# Altium PCB RPi Stepper Hat V1.1 PcbDoc.PcbDoc
Units mm, origin at the board's own origin, x right, y up, seen from the top; angles counter-clockwise.
Board outline 122 x 60.5 mm, 2 copper layers (Top Layer, Bottom Layer), stack 0.671 mm thick; 30 components, 21 nets, 137 pads, 21 vias.
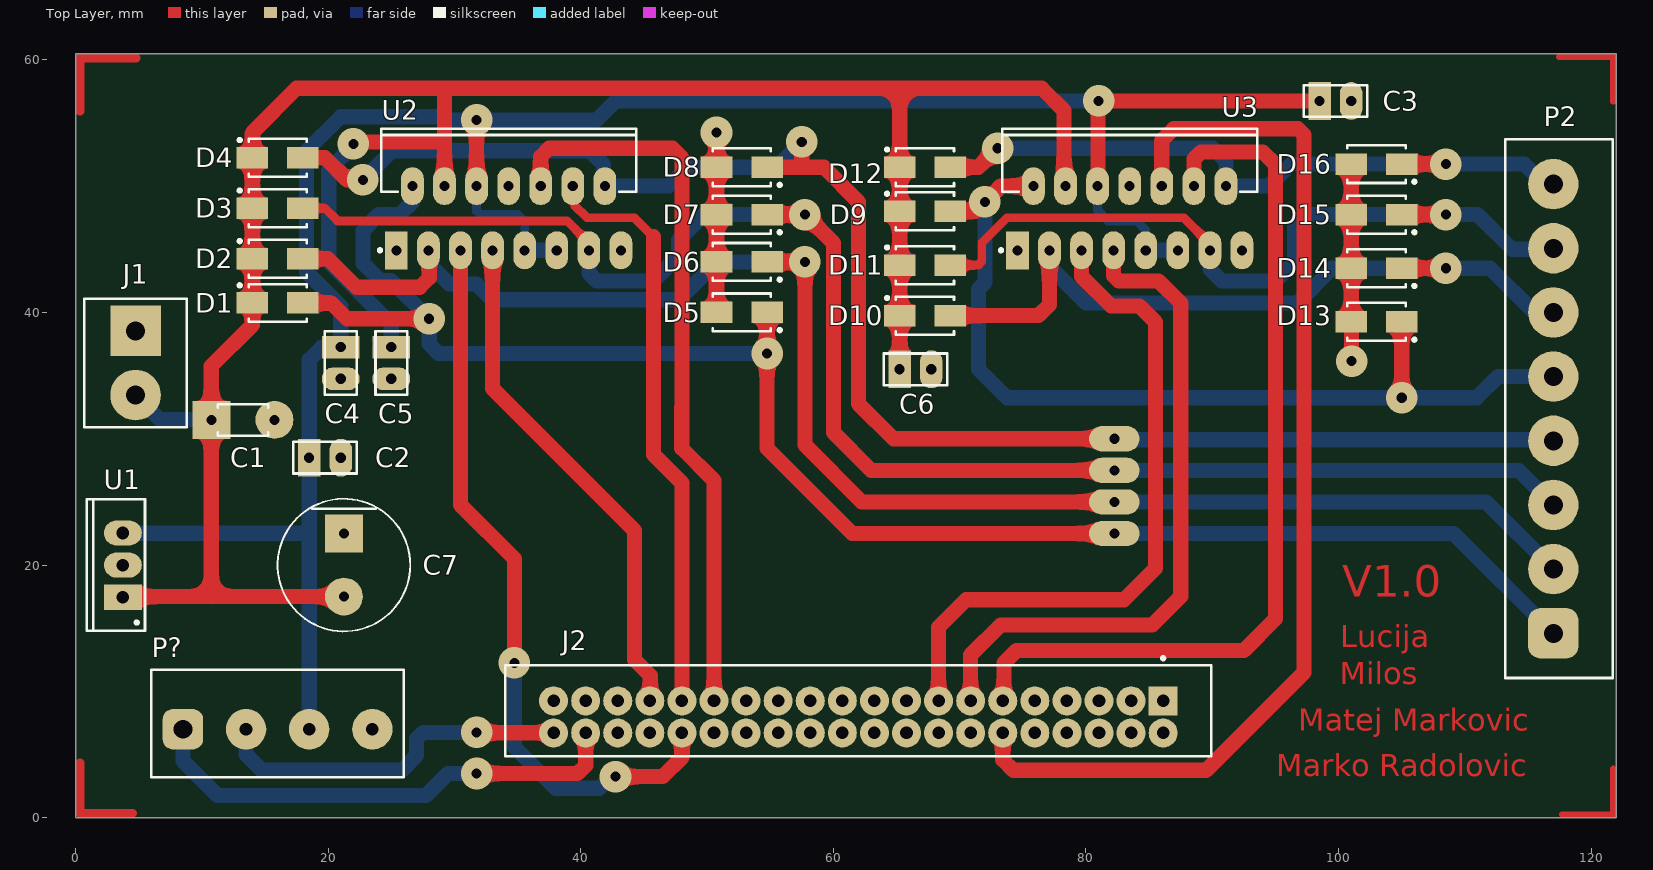
[diagram p0: Top Layer view]
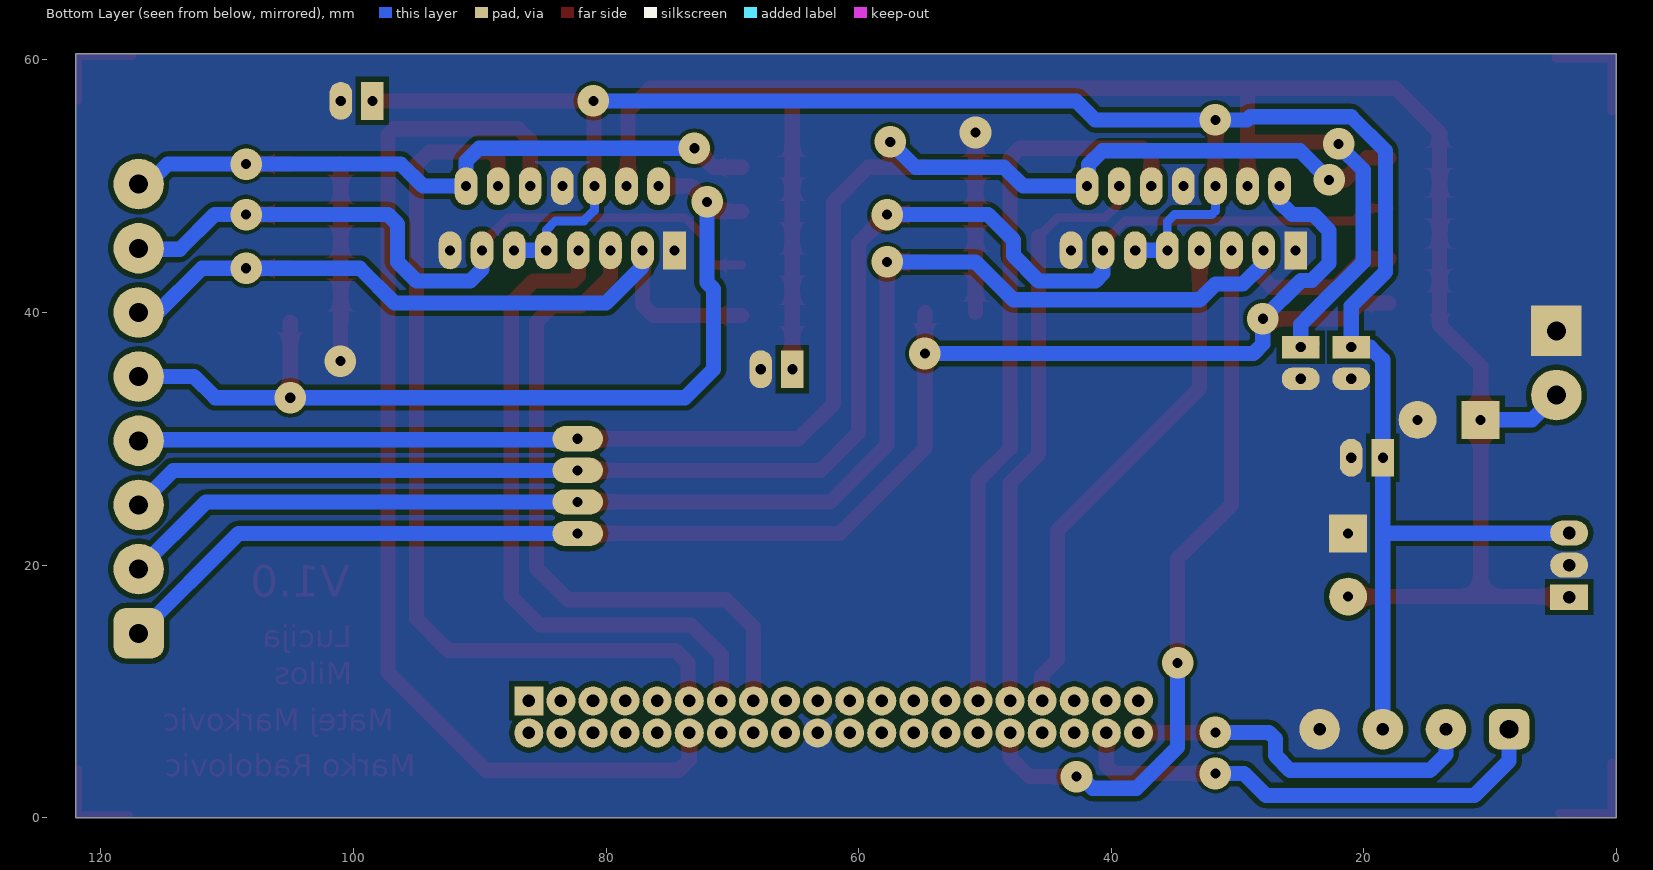
[diagram p1: Bottom Layer view, seen from below]
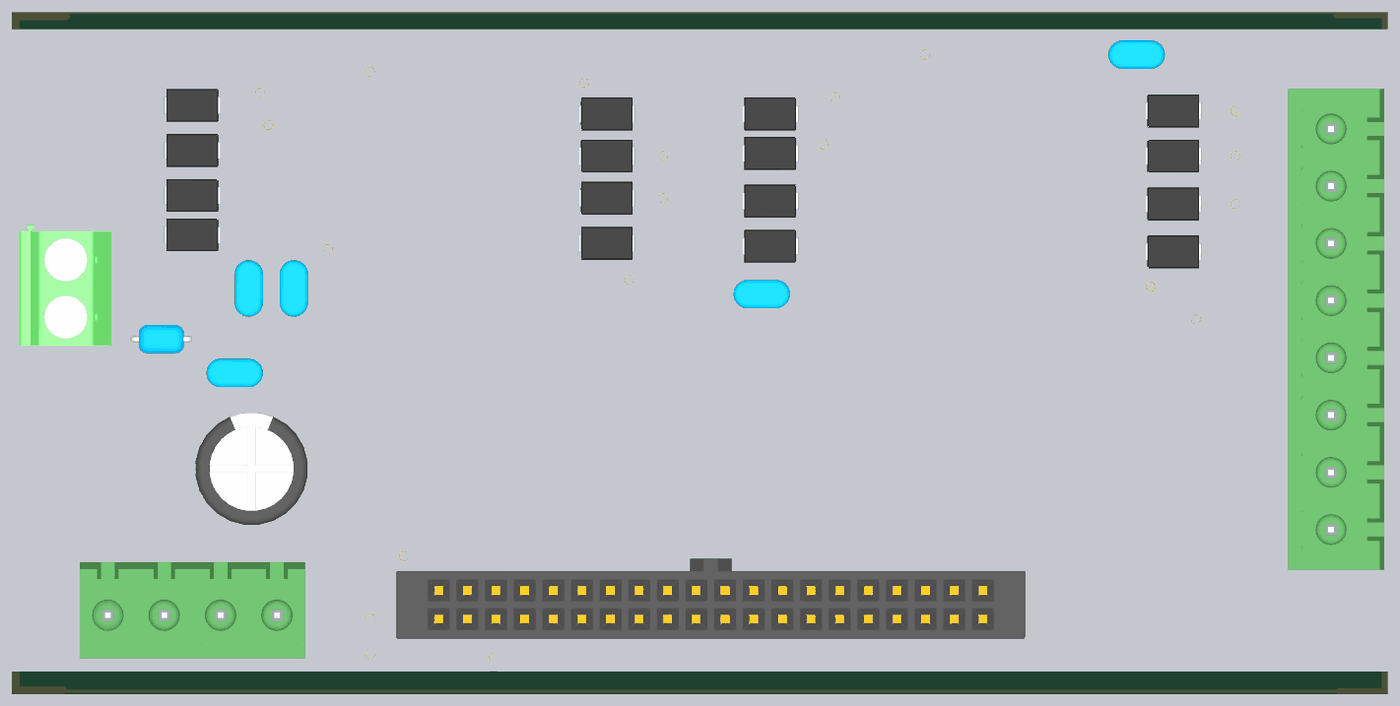
[diagram p2: 3D render of the assembled board from above, using the file's embedded part models]

## Layer stack, top to bottom
Top Solder: solder mask 0.0102, Solder Resist, Dk 3.5
Top Layer: signal copper 0.0356
Dielectric 1: dielectric 0.6, FR-4, Dk 4.8
Bottom Layer: signal copper 0.0356
Bottom Solder: solder mask 0.0102, Solder Resist, Dk 3.5

## Board outline
0,0 122,0 122,60.5 0,60.5

## Design rules (kind name [scope] priority, off if disabled: settings)
Clearance [All] p1: gap=0.3 ignorepadtopadclearanceinfootprint=TRUE except(0.4: Track-Poly THPad-Poly)
PolygonConnect [All] p1: connectstyle=Direct reliefconductorwidth=0.254 reliefentries=4 polygonreliefangle="90 Angle" airgapwidth=0.254
RoutingVias [All] p1: holewidth=0.711 width=1.27 viastyle="Through Hole" minholewidth=0.711 minwidth=1.27 maxholewidth=0.711 maxwidth=1.27
SolderMaskExpansion [All] p1: expansion=0.102 istentingtop=FALSE
Width [All] p1: maxlimit=2 minlimit=0.5 preferedwidth=0.5
30 further rules are at their usual default settings.

## Components (designator, comment, footprint, x,y, rotation, side; value= is the part's Value field where it differs from the comment)
C1 "220n" FP-RCE1K1-2_5-MFG 13.25,31.5 r0 top
C2 "100n" FP-RDE0P1-MFG 19.75,28.5 r0 top
C3 "100n" FP-RDE0P1-MFG 99.75,56.75 r0 top
C4 "100n" FP-RDE0P1-MFG 21,36 r270 top
C5 "100n" FP-RDE0P1-MFG 25,36 r270 top
C6 "100n" FP-RDE0P1-MFG 66.5,35.5 r0 top
C7 "220u" FP-RAD-TH-D_10_0_5-L_25_2-MFG 21.25,20 r270 top
D1 "RFN2VWM2STR" DIOM4326X24N 16,40.75 r0 top
D2 "RFN2VWM2STR" DIOM4326X24N 16,44.25 r0 top
D3 "RFN2VWM2STR" DIOM4326X24N 16,48.25 r0 top
D4 "RFN2VWM2STR" DIOM4326X24N 16,52.25 r0 top
D5 "RFN2VWM2STR" DIOM4326X24N 52.75,40 r180 top
D6 "RFN2VWM2STR" DIOM4326X24N 52.75,44 r180 top
D7 "RFN2VWM2STR" DIOM4326X24N 52.75,47.75 r180 top
D8 "RFN2VWM2STR" DIOM4326X24N 52.75,51.5 r180 top
D9 "RFN2VWM2STR" DIOM4326X24N 67.25,48 r0 top
D10 "RFN2VWM2STR" DIOM4326X24N 67.25,39.75 r0 top
D11 "RFN2VWM2STR" DIOM4326X24N 67.25,43.75 r0 top
D12 "RFN2VWM2STR" DIOM4326X24N 67.25,51.5 r0 top
D13 "RFN2VWM2STR" DIOM4326X24N 103,39.25 r180 top
D14 "RFN2VWM2STR" DIOM4326X24N 103,43.5 r180 top
D15 "RFN2VWM2STR" DIOM4326X24N 103,47.75 r180 top
D16 "RFN2VWM2STR" DIOM4326X24N 103,51.75 r180 top
J1 "1729128" PHOE-1729128-2_V 4.75,36 r270 top
J2 "SFH11-PBPC-D20-ST-BK" FP-SFH11-PBPC-D20-ST-BK-MFG 61.98,8.48 r180 top
P2 "691311500108" 691311500108 117.45,32.38 r90 top
P? "691311700004" 691311700004 16,7.45 r0 top
U1 "L7805CV" TO220 3.75,20 r90 top
U2 "L298N" STM-FM-15 34.29,47.46 r90 top
U3 "L298N" STM-FM-15 83.46,47.46 r90 top

## Footprints (in the part's own frame and the unit in brackets; to place one, negate y for a bottom-side part, rotate by r counter-clockwise, add the part's x,y. Pads: shape width x height; smd on the part's side, far side on the other; paste and mask are expansions set on the pad)
691311500108 [mm] "5,08mm - PCB Headers - Vertical - Closed ends -08p"
  rrect50% 4x4 hole 1.5: 1(-17.78,0.45)
  round 4 hole 1.5: 2(-12.7,0.45) 3(-7.62,0.45) 4(-2.54,0.45) 5(2.54,0.45) 6(7.62,0.45) 7(12.7,0.45) 8(17.78,0.45)
  silkscreen extent -21.32,-4.25 21.32,4.25, body extent -21.32,-4.25 21.32,4.25, height 12.05
691311700004 [mm] "5.00mm - Open Vertical PCB Header - 04p"
  rrect50% 3.2x3.2 hole 1.5: 1(-7.5,-0.45)
  round 3.2 hole 1: 2(-2.5,-0.45) 3(2.5,-0.45) 4(7.5,-0.45)
  silkscreen extent -10,-4.25 10,4.25, body extent -10,-4.25 10,4.25, height 12.1
DIOM4326X24N [mm] "Molded Diode, 2-Leads, Body 4.30x2.61mm, IPC Medium Density"
  rect 2.5x1.7 smd: A(2,0) K(-2,0)
  silkscreen extent -3.12,-1.5 2.3,1.52, body extent -2.52,-1.46 2.52,1.46, height 2.4
FP-RAD-TH-D_10_0_5-L_25_2-MFG [mm]
  rect 3x3 hole 0.8 paste-1000 mask+0: 1(-2.5,0)
  round 3 hole 0.8 paste-1000 mask+0: 2(2.5,0)
  silkscreen extent -5.25,-5.25 5.25,5.25, body extent -5.35,-5.35 5.35,5.35, height 0.25
FP-RCE1K1-2_5-MFG [mm]
  rect 3x3 hole 0.8 paste-1000 mask+0: 1(-2.5,0)
  round 3 hole 0.8 paste-1000 mask+0: 2(2.5,0)
  silkscreen extent -2,-1.25 2,1.25, body extent -3.2,-1.35 3.2,1.35, height 0.25
FP-RDE0P1-MFG [mm]
  rect 1.8x3 hole 0.8 paste-1000 mask+0: 1(-1.25,0)
  oval 1.8x3 hole 0.8 paste-1000 mask+0: 2(1.25,0)
  silkscreen extent -2.5,-1.25 2.5,1.25, body extent -2.6,-1.35 2.6,1.35, height 0.25
FP-SFH11-PBPC-D20-ST-BK-MFG [mm]
  rect 2.3x2.3 hole 1 paste-1000 mask+0: 1(-24.13,-0.77)
  round 2.3 hole 1 paste-1000 mask+0: 2(-24.13,1.77) 3(-21.59,-0.77) 4(-21.59,1.77) 5(-19.05,-0.77) 6(-19.05,1.77) 7(-16.51,-0.77) 8(-16.51,1.77) 9(-13.97,-0.77) 10(-13.97,1.77) 11(-11.43,-0.77) 12(-11.43,1.77) 13(-8.89,-0.77) 14(-8.89,1.77) 15(-6.35,-0.77) 16(-6.35,1.77) 17(-3.81,-0.77) 18(-3.81,1.77) 19(-1.27,-0.77) 20(-1.27,1.77) 21(1.27,-0.77) 22(1.27,1.77) 23(3.81,-0.77) 24(3.81,1.77) 25(6.35,-0.77) 26(6.35,1.77) 27(8.89,-0.77) 28(8.89,1.77) 29(11.43,-0.77) 30(11.43,1.77) 31(13.97,-0.77) 32(13.97,1.77) 33(16.51,-0.77) 34(16.51,1.77) 35(19.05,-0.77) 36(19.05,1.77) 37(21.59,-0.77) 38(21.59,1.77) 39(24.13,-0.77) 40(24.13,1.77)
  silkscreen extent -27.94,-4.27 27.94,3.6, body extent -27.86,-3.55 27.86,3.55, height 8.7
PHOE-1729128-2_V [mm] "Receptacle, 2-Leads, Body 8.1x10.16mm, Pitch 5.08mm"
  rect 4x4 hole 1.5: 1(-2.54,0)
  round 4 hole 1.5: 2(2.54,0)
  silkscreen extent -5.08,-4.05 5.08,4.05, body extent -5.65,-4.05 5.08,4.05, height 10.01
STM-FM-15 [mm] "FM, 15-Leads, Body 20.2x5mm, Pitch 1.27mm"
  rect 3x1.8 hole 0.8: 1(-2.54,8.89)
  oval 3x1.8 hole 0.8: 2(2.54,7.62) 3(-2.54,6.35) 4(2.54,5.08) 5(-2.54,3.81) 6(2.54,2.54) 7(-2.54,1.27) 8(2.54,0) 9(-2.54,-1.27) 10(2.54,-2.54) 11(-2.54,-3.81) 12(2.54,-5.08) 13(-2.54,-6.35) 14(2.54,-7.62) 15(-2.54,-8.89)
  silkscreen extent -2.66,-10.1 7.09,10.31, body extent -2.8,-10.1 7.09,10.1, height 21
TO220 [mm] "TO, Thru-Hole, Vertical, Heatsink Mounted; 3 In-Line Leads; Pitch 2.54 mm"
  rect 2x3 hole 1: 1(-2.54,0)
  oval 2x3 hole 1: 2(0,0) 3(2.54,0)
  silkscreen extent -5.2,-1.75 5.2,2.85, body extent -5.25,-1.8 5.25,2.9, height 19.7

## Part data
C1: library part CMP-06035-036150-1, "Cap Ceramic Monolithic 220nF 50V 10% Thru-Hole Bulk RCER71H224K1M1H03A", Capacitance=220nF, Case/Package=Radial, Dielectric=X7R, Max Operating Temperature=125°C, Min Operating Temperature=-55°C, Package Quantity=1, Ratings=AEC-Q200, Resistor Type=Ceramic, Tolerance=10%, Voltage Rating=50V, Height=3.5mm, Height - Seated (Max)=0.138inch, Lead Diameter=0.5mm, Lead Pitch=0.197inch, Lead/Base Style="Formed Leads", Length=0.157inch, Mount="Through Hole", Packaging="Tape and Reel", Termination=Radial, Voltage Rating (DC)=50V, Width=0.098inch
C2 C3 C4 C5 C6: library part CMP-06035-046728-1, "Ceramic Capacitor 100nF ±10% 25V X7R Radial RDER71E104K0S1H03A", Capacitance=100nF, Case/Package=Radial, Dielectric=X7R, Max Operating Temperature=125°C, Min Operating Temperature=-55°C, Package Quantity=2000, Resistor Type=Ceramic, Tolerance=10%, Voltage Rating=25V, Height=3.5mm, Height - Seated (Max)=0.236inch, Lead Diameter=0.5mm, Lead Free="Lead Free", Lead Pitch=0.098inch, Length=0.197inch, Mount="Through Hole", Packaging="Tape and Reel", Termination=Radial, Voltage Rating (DC)=25V, Width=3.5mm
C7: library part CMP-05427-000604-1, "Aluminum Electrolytic Capacitors (Radial Lead Type) 220uF ±20% 63V EEUFR1J221LB", Capacitance=220uF, Case/Package=Radial, ESR (Equivalent Series Resistance)=33mR, Max Operating Temperature=105°C, Min Operating Temperature=-40°C, Package Quantity=500, Ripple Current=1.5A, Tolerance=20%, Voltage Rating=63V, Construction=Cylindrical, Diameter=10mm, Height=25mm, Height - Seated (Max)=1.063inch, Impedance=33mR, Lead Diameter=0.6mm, Lead Free="Lead Free", Lead Pitch=5mm, Length=25mm, Life (Hours)=10000Hour, Mount="Through Hole", Packaging="Tape and Reel", Polarity=Polar, Radiation Hardening=No, REACH SVHC=Yes, RoHS Compliant=Yes, Series=FR, Termination=Radial, Voltage Rating (DC)=63V
J1: library part CMP-2000-05815-1, "PCB Terminal Block, 13.5 A, 400 V, 2-Pin THD, RoHS, Bulk", Current Rating=13500mA, Manufacturer="Phoenix Contact", Package Description="2-Pin Through Hole Device, Body 8.1 x 10.16 mm, Pitch 5.08 mm", Package Reference=1729128-2, Package Version=03/2015, Voltage Rating=400V, Datasheet URL=https://datasheet.ciiva.com/16046/1729128-16046181.pdf, Datasheet Version=12/2013, Manufacturer URL=http://www.phoenixcontact.com/, Mounting Technology=ThroughHole, No. of Positions=2, No. of Rows=1, Orientation=Horizontal, Package URL=https://www.phoenixcontact.com/online/portal/pi/pxc/product_detail_page/!ut/p/b1/3VdJjqNKFDxLH8AFycySyWY2ozFsEPOMMQaDOX1XedGL_1Vdm5YXJleknhSKeBkvI6EA8ncAo3AYoDhBQGco6KN7VURTdemj9us_IEKEZo_YHiPAEWEFmDGOHMORkqKYCORBZxgL7ZoaZYcbFFUZ3fqxSY6GOuxydWUuHqz1ynmMFygu583Bob0Ewr6Sd_l-5m-kAueHiB0jpRwZwe58wwtkpxtMYd_LmGcDRU02dRNEyWt6Y2ti5pSyJ_reIkzIulrqApdnbT11V5jnCKbYNCvhEM1MCpPByat_X379-iThf08CI5GfOPqfBeS3BRoBOdD55AKVv0iLwCMq-2BrzXWSGRH7pUGD9uwXQjiph3xL0DKQwdGa0JImiIOmBNOestqgwTHSSs2oOep-78apyXQBvNi8ZLaFjvjWvcaUEBu0MC6Wbe-d6mB0FAebo2lUWinqYaZs5DAYzV0RP9yitUjnGJ0iI9xhZkT42OCQNUJJhkgWINNQLP2JFP6OpMg3JCVg70jqHT0lvKOnhHf0lPuOnnLf0VPuWx6_dxwUIvwk5WMkT0kLL1mh61l2yZVSzG3pYV_bqo-mj6uMKwKwdnnW8Jh5RTOJzMOA5c-eJDaZQw4mTMPH02PvS_ZAqNVjVTo2WyYLkwH_KU1mmmG5kjRhDqPXLwwVHvVOjCM60-fpXvTDfMGW1PVFVS1r4e4yVDk4ZdNbkUHvqPqQSeian4UD39fNKmachqdJ1NJbyk8rXT9mXTvPk3oE5meulKGgiruPJek-4I9hTT6G8ZLOyRSm2RRVbThERQad5OS28hdt4YW4vG0stgYYzsWsK4_7y6DZMjJSCqri1kyiZR5vD7pwIrNR7QwPHTcLTI5qT7eRlpHrdGiupYlqQDJ7zy_CND8fWWBoLRXxk1RVcXiBQwbTD4Xi7KL-FuO94t9xaqweXzH, Packing=Bulk, PartNumber=1729128, Pitch=5.08mm, RoHS=TRUE
J2: library part CMP-25680-000025-1, "CONN HDR 40POS 0.1 GOLD PCB", Color=Black, Package Quantity=1, Connector Type=Header, Contact Plating=Gold, Lead Free="Lead Free", Mount="Through Hole", Number of Positions=40, Number of Rows=2, Packaging=Tray, Pitch=0.1inch, Row Spacing=0.1inch, Termination=Solder
P2: library part CMP-1502-02152-2, Color=Green, Current=20A, Voltage=300V, Contact Gender=Male, Contact Material=Brass, Contact Plating=Tin, Current Rating=20A, Gender=Male, Height=12mm, Lead Pitch=5.08mm, Length=8.5mm, Mount="Through Hole", NexarPartId=8917752, Number of Contacts=8, Number of Levels=1, Number of Pins=8, Number of Positions Per Level=8, Number of Rows=1, Orientation=Vertical, Packaging=Box, Pitch=5.08mm, REACH SVHC="No SVHC", RoHS=Compliant, Termination=Solder, Width=42.64mm
P?: library part CMP-1502-02028-2, Color=Green, Current=20A, Voltage=300V, Connector Type="PCB, Terminal Block", Contact Material=Brass, Gender=Male, Height=12mm, Lead Pitch=5mm, Length=8.5mm, Mount="Through Hole", NexarPartId=18818306, Number of Contacts=4, Number of Levels=1, Number of Pins=4, Number of Positions Per Level=4, Number of Rows=1, Orientation=Vertical, Packaging=Box, Pitch=5.0038mm, REACH SVHC=Unknown, RoHS=Compliant, Termination=Solder, Width=20mm
U1: library part CMP-0244-00483-1, "Positive Voltage Regulator, 5V, 3-Pin TO-220", ComponentLink1Description="Manufacturer URL", ComponentLink1URL=http://www.st.com, ComponentLink2Description=Datasheet, ComponentLink2URL=http://www.st.com/internet/com/TECHNICAL_RESOURCES/TECHNICAL_LITERATURE/DATASHEET/CD00000444.pdf, ComponentLink3Description="Package Specification", ComponentLink3URL=http://www.st.com/internet/com/TECHNICAL_RESOURCES/TECHNICAL_LITERATURE/PACKAGE_INFORMATION/CD00004649.pdf, DatasheetVersion=16/11/2011, PackageDescription="TO, Thru-Hole, Vertical, Heatsink Mounted; 3 In-Line Leads; Pitch 2.54 mm", PackageReference=TO220, PackageVersion=ver3.0
U2 U3: library part CMP-2000-06526-1, "Dual Full-Bridge Driver, 4.8 to 46 V, -40 to 150 degC, 15-Pin FM (MW 15L), RoHS, Tube", Driver Case Style=Multiwatt, Manufacturer=STMicroelectronics, Operating Temperature Max=130°C, Operating Temperature Min=-25°C, Output Current=2A, Output Voltage=46V, Package Description="15-Pin Flange Mount, Body 5 x 19.6 mm, Pitch 1.27 mm", Package Reference=FM-15, PartNumber=L298, Supply Voltage Max=7V, Supply Voltage Min=4.5V, Automotive Qualification Standard=-, Datasheet URL=https://datasheet.ciiva.com/15109/getdatasheetpartid-50682-15109332.pdf, Datasheet Version=01/2000, Manufacturer URL=http://www.st.com/, Motor Type=FullBridge, Mounting Technology=ThroughHole, MSL=-, No. of Outputs=4Outputs, No. of Pins=15Pins, Packaging=Each, Product Range=-, SVHC=NoSVHC(17-Dec-2015)

## Free pads (board coordinates)
  oval 4x2 hole 0.8: 10(82.25,22.5) 10(82.25,25) 10(82.25,27.5) 10(82.25,30)

## Via types
v1: diameter 2.5, hole 0.8, Top Layer to Bottom Layer, 21 vias

## Nets (pads, with @x,y where several pads share a name; then routed paths per layer and width w, separated by ;. In a path a pad name is that pad's centre, name@x,y a point inside that pad or via, vN(x,y) a via of type N, cw(c..) or ccw(c..) an arc to the next point about the centre after c; other vN are vias at no path point)
+5V: C2.1 C3.1 C4.1 P?.3 U1.3 U2.6 U2.9 U2.11 U3.6 U3.9 U3.11 | length 179.5
  Top Layer w0.5: U3.6 U3.6@80.96,50.04
  Top Layer w1.2: U2.6 v1(31.75,55.25) ; U3.6@80.96,50.04 80.96,56.71 v1(81,56.75) ; v1@81.035,56.715 81.07,56.75 98.2,56.75 98.5,56.45 C3.1@98.5,56.25
  Bottom Layer w0.7: U2.6 31.75,48.043 32.043,47.75 35,47.75 35.56,47.19 U2.9 ; U3.6@81,50.08 U3.6 80.92,48.08 81.75,47.25 84,47.25 84.73,46.52 U3.9
  Bottom Layer w1.2: U1.3 3.77,22.52 18.5,22.52 ; P?.3 18.5,22.52 ; U2.9 U2.11 ; v1(81,56.75) 42.771,56.75 41.271,55.25 v1(31.75,55.25) 29.25,55.25 29,55.5 21,55.5 18.3,52.8 18.3,43.2 21,40.5 C4.1 19.5,37.25 18.5,36.25 C2.1 18.5,22.52 ; U3.9 U3.11
GND: C1.2 C2.2 C3.2 C4.2 C5.2 C6.2 C7.1 D5.A D6.A D7.A D8.A D13.A D14.A D15.A D16.A J1.1 J2.20 P?.4 U1.2 U2.1 U2.8 U2.15 U3.1 U3.8 U3.15 | length 29.9
  Top Layer w0.5: J1.1 J1.1@4.79,38.5 ; D13.A D13.A@101.025,39.225
  Top Layer w1.2: D5.A D6.A D7.A D8.A v1(50.75,54.25) ; D13.A D14.A D15.A D16.A ; v1(101.025,36.15) D13.A@101.025,39.225
"IN 1 A": J2.32 U2.5 | length 58.7
  Top Layer w1.2: U2.5 30.48,24.77 34.75,20.5 v1(34.75,12.25) ; v1(42.75,3.25) 46.488,3.25 48.01,4.772 J2.32
  Bottom Layer w1.2: v1(34.75,12.25) 34.75,5.579 38,2.329 41.477,2.329 42.398,3.25 v1(42.75,3.25)
"IN 1 B": J2.15 U3.5 | length 53.8
  Top Layer w1.2: J2.15 68.33,15.08 70.5,17.25 83,17.25 85.5,19.75 85.5,39.25 84.25,40.5 82,40.5 79.65,42.85 U3.5
"IN 2 A": J2.33 U2.7 | length 40.9
  Top Layer w1.2: U2.7 33.02,33.98 44.25,22.75 44.25,12.5 45.5,11.25 45.5,9.28 J2.33
"IN 2 B": J2.13 U3.7 | length 53.6
  Top Layer w1.2: J2.13 70.87,12.87 73.25,15.25 85.25,15.25 87.5,17.5 87.5,40.75 85.75,42.5 82.6,42.5 82.19,42.91 U3.7
"IN 3 A": J2.29 U2.10 | length 58.2
  Top Layer w0.7: 48,32.49 48.01,32.5 ; J2.29@50.5,9.3 J2.29
  Top Layer w1.2: U2.10 36.83,52.33 37.5,53 47.25,53 48.01,52.24 48.01,45.99 48.01,32.5 ; 48,32.49 48,29.25 50.55,26.7 J2.29
"IN 3 B": J2.12 U3.10 | length 87.5
  Top Layer w1.2: J2.12 73.41,4.59 74.25,3.75 89.5,3.75 97.25,11.5 97.25,14 97.25,44.8 97.25,54.075 96.775,54.55 86.95,54.55 86,53.6 U3.10
"IN 4 A": J2.31 U2.12 | length 46.5
  Top Layer w0.7: U2.12 39.5,49.87 39.5,48.5 40.5,47.5 44.25,47.5 45.75,46
  Top Layer w1.2: 45.75,46 45.75,28.75 48.01,26.49 J2.31
"IN 4 B": J2.11 U3.12 | length 71.2
  Top Layer w1.2: J2.11 73.5,9.34 73.5,12.25 74.5,13.25 92.5,13.25 95,15.75 95,51.7 94,52.7 89.1,52.7 88.54,52.14 U3.12
"OptoInterrupt 1": J2.38 P?.1 | length 39.1
  Top Layer w1.2: v1(31.75,3.5) 39.75,3.5 40.39,4.14 J2.38
  Bottom Layer w1.2: P?.1 8.5,4.5 11.25,1.75 27.75,1.75 29.5,3.5 v1(31.75,3.5)
"OptoInterrupt 2": J2.40 P?.2 | length 29.2
  Top Layer w1.2: v1(31.75,6.75) 31.77,6.73 37.83,6.73 J2.40
  Bottom Layer w1.2: P?.2@13.73,6.77 P?.2 13.5,5 14.75,3.75 25.84,3.75 27,4.91 27,6.25 27.5,6.75 v1(31.75,6.75)
"OUT 1 A": D1.A D5.K P2.1 pad.10@82.25,22.5 U2.2 | length 135.1
  Top Layer w1.2: D1.A 20.25,40.75 21.5,39.5 v1(28,39.5) ; D5.K v1(54.75,36.75) 54.75,29.25 61.5,22.5 pad.10@82.25,22.5
  Bottom Layer w1.2: U2.2 26.67,48.753 25.667,47.75 24,47.75 22.75,46.5 22.75,43.897 24.127,42.52 24.98,42.52 v1(28,39.5) 28,37.5 28.75,36.75 v1(54.75,36.75) ; pad.10@82.849,22.325 82.789,22.385 82.365,22.385 82.25,22.5 109.1,22.5 P2.1
"OUT 1 B": D9.A D13.K P2.5 U3.2 | length 74
  Top Layer w1.2: D9.A 71.25,48 73.25,50 U3.2 ; v1(105,33.25) D13.K
  Bottom Layer w1.2: v1(72,48.75) 72,42.366 71.5,41.866 71.5,35.5 73.75,33.25 110.932,33.25 112.616,34.934 116.986,34.934 P2.5
"OUT 2 A": D2.A D6.K P2.2 pad.10@82.25,25 U2.3 | length 126.3
  Top Layer w1.2: D2.A 20,44.25 22.25,42 27.25,42 28,42.75 28,44.86 U2.3 U2.3@28,44.98 ; D6.K v1(57.75,44) 57.75,29.5 62.25,25 pad.10@82.25,25
  Bottom Layer w1.2: U2.3@28.144,43.692 29.586,42.25 31.75,42.25 33,41 47.75,41 50.75,44 v1(57.75,44) ; pad.10@82.25,25 111.68,25 P2.2
"OUT 2 B": D10.A D14.K P2.6 U3.3 | length 61
  Top Layer w1.2: D10.A 76.25,39.75 77.11,40.61 U3.3 ; D14.K v1(108.5,43.5)
  Bottom Layer w1.2: U3.3 77.141,44.889 77.141,43.609 80,40.75 96.75,40.75 99.5,43.5 v1(108.5,43.5) 112,43.5 115.546,39.954 116.954,39.954 P2.6
"OUT 3 A": D3.A D7.K P2.3 pad.10@82.25,27.5 U2.13 | length 127
  Top Layer w0.7: D3.A 19.75,48.25 20.75,47.25 38.91,47.25 40.64,45.52 U2.13
  Top Layer w1.2: D7.K v1(57.75,47.75) 60,45.5 60,30.5 63,27.5 pad.10@82.25,27.5
  Bottom Layer w1.2: U2.13 40.64,43.11 41.25,42.5 45.75,42.5 47.75,44.5 47.75,45.75 49.75,47.75 v1(57.75,47.75) ; pad.10@82.25,27.5 114.26,27.5 P2.3
"OUT 3 B": D11.A D15.K P2.7 U3.13 | length 62
  Top Layer w0.7: D11.A 71.457,43.75 71.75,44.043 71.75,45.5 73.75,47.5 87.75,47.5 89.81,45.44 U3.13
  Top Layer w1.2: D15.K v1(108.5,47.75)
  Bottom Layer w1.2: U3.13 89.83,44.9 89.83,43.42 90.75,42.5 95,42.5 96.5,44 96.5,47 97.25,47.75 v1(108.5,47.75) 111,47.75 113.75,45 116.92,45 P2.7
"OUT 4 A": D4.A D8.K P2.4 pad.10@82.25,30 U2.14 | length 127.4
  Top Layer w1.2: D4.A 19.75,52.25 21.5,50.5 v1(22.75,50.5) ; D8.K 57.5,51.5 ; v1(57.5,53.5) 57.5,51.5 ; pad.10@82.25,30 64.75,30 62,32.75 62,48.75 59.25,51.5 57.5,51.5
  Bottom Layer w0.5: pad.10@82.25,30 pad.10@82.33,29.92 ; P2.4@116.92,29.92 P2.4
  Bottom Layer w1.2: v1(22.75,50.5) 25.05,52.8 40.7,52.8 41.795,51.705 41.795,50.115 U2.14 47,50 48.5,51.5 55.5,51.5 v1(57.5,53.5) ; pad.10@82.33,29.92 P2.4@116.92,29.92 ; P2.4@116.91,29.75 P2.4
"OUT 4 B": D12.A D16.K P2.8 U3.14 | length 55.9
  Top Layer w1.2: D12.A 71.5,51.5 v1(73,53) ; D16.K v1(108.5,51.75)
  Bottom Layer w1.2: v1(73,53) 90.052,53 91.08,51.972 U3.14 94.5,50 96.25,51.75 v1(108.5,51.75) 114.701,51.75 116.291,50.16 P2.8 P2.8@116.84,50
VCC: C1.1 C5.1 C6.1 C7.2 D1.K D2.K D3.K D4.K D9.K D10.K D11.K D12.K J1.2 U1.1 U2.4 U3.4 | length 192.2
  Top Layer w1.2: U1.1 3.79,17.5 10.75,17.5 ; C7.2 10.75,17.5 ; v1(22,53.35) 22.15,53.5 29.21,53.5 ; U2.4 29.21,53.5 ; C6.1 D10.K D11.K 65.25,57.75 ; U3.4 78.25,50.13 78.25,56 76.5,57.75 65.25,57.75 ; 10.75,17.5 C1.1 10.75,35.75 14,39 D1.K D2.K D3.K D4.K 14,54.25 17.5,57.75 29.25,57.75 ; 29.21,53.5 29.21,57.71 29.25,57.75 ; 29.25,57.75 65.25,57.75
  Bottom Layer w1.2: J1.2 6.71,31.5 C1.1 ; v1(22,53.35) 22,53.218 20.05,51.268 20.05,44 24.1,39.95 25,39.05 C5.1 24.4,37.25 C5.1@24.1,37.55
pads on no net: J2.1 J2.2 J2.3 J2.4 J2.5 J2.6 J2.7 J2.8 J2.9 J2.10 J2.14 J2.16 J2.17 J2.18 J2.19 J2.21 J2.22 J2.23 J2.24 J2.25 J2.26 J2.27 J2.28 J2.30 J2.34 J2.35 J2.36 J2.37 J2.39
copper on no net: | length 32.3
  Top Layer w0.5: 117.449,60.25 121.75,60.25 121.75,56.7 ; 117.681,0.25 121.75,0.25 121.75,3.881
  Top Layer w0.7: 0.35,4.35 0.35,0.35 4.5,0.35 ; 0.35,55.925 0.35,60.125 ; 0.35,60.15 4.776,60.15

## Polygon pours and split planes (outlines as drawn)
GND on Bottom Layer "GND_L02_P000" (solid, remove dead copper, pour order 0): 0,0 0,60.5 122,60.5 122,0

## Other copper
Top Layer:
  text "V1.0" at 100.3,17.475 h2.5
  text "Lucija" at 100.125,13.483 h1.75
  text "Milos" at 100.075,10.575 h1.75
  text "Matej Markovic" at 96.8,6.883 h1.75
  text "Marko Radolovic" at 95.05,3.3 h1.75

## Silkscreen, mask and mechanical layers (free items; w line width, h text height)
Board:
  lines w0.2: 0,2 0,59 122,59 122,2 0,2

## Dimensions
0,60.5 to 122,60.5 on Top Layer
0,60.5 to 121.75,0.25 on Top Layer